# Altium PCB PCB.PcbDoc
Units mm, origin at the board's own origin, x right, y up, seen from the top; angles counter-clockwise.
Board outline 77.72 x 105.66 mm, 2 copper layers (Top Layer, Bottom Layer); 75 components, 50 nets, 276 pads, 0 vias.
Unrouted connection lines stored in the file: 198.
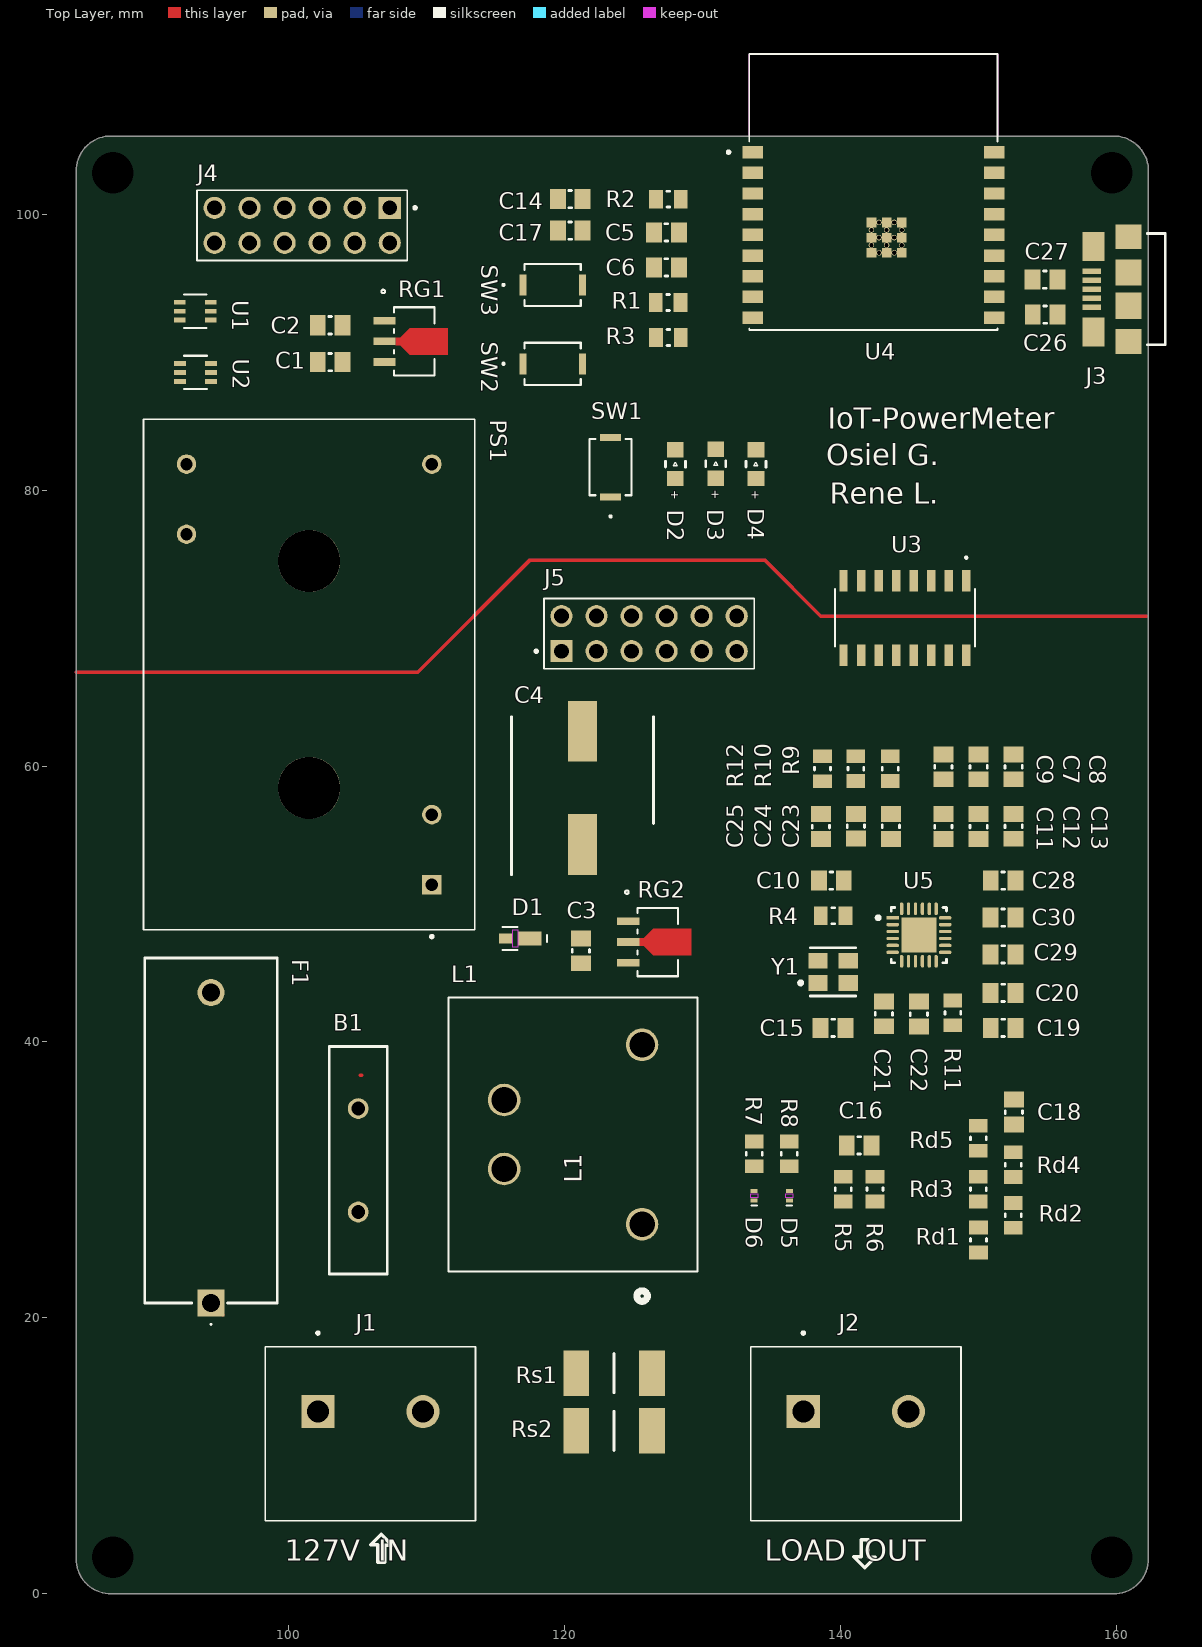
[diagram p0: Top Layer view]
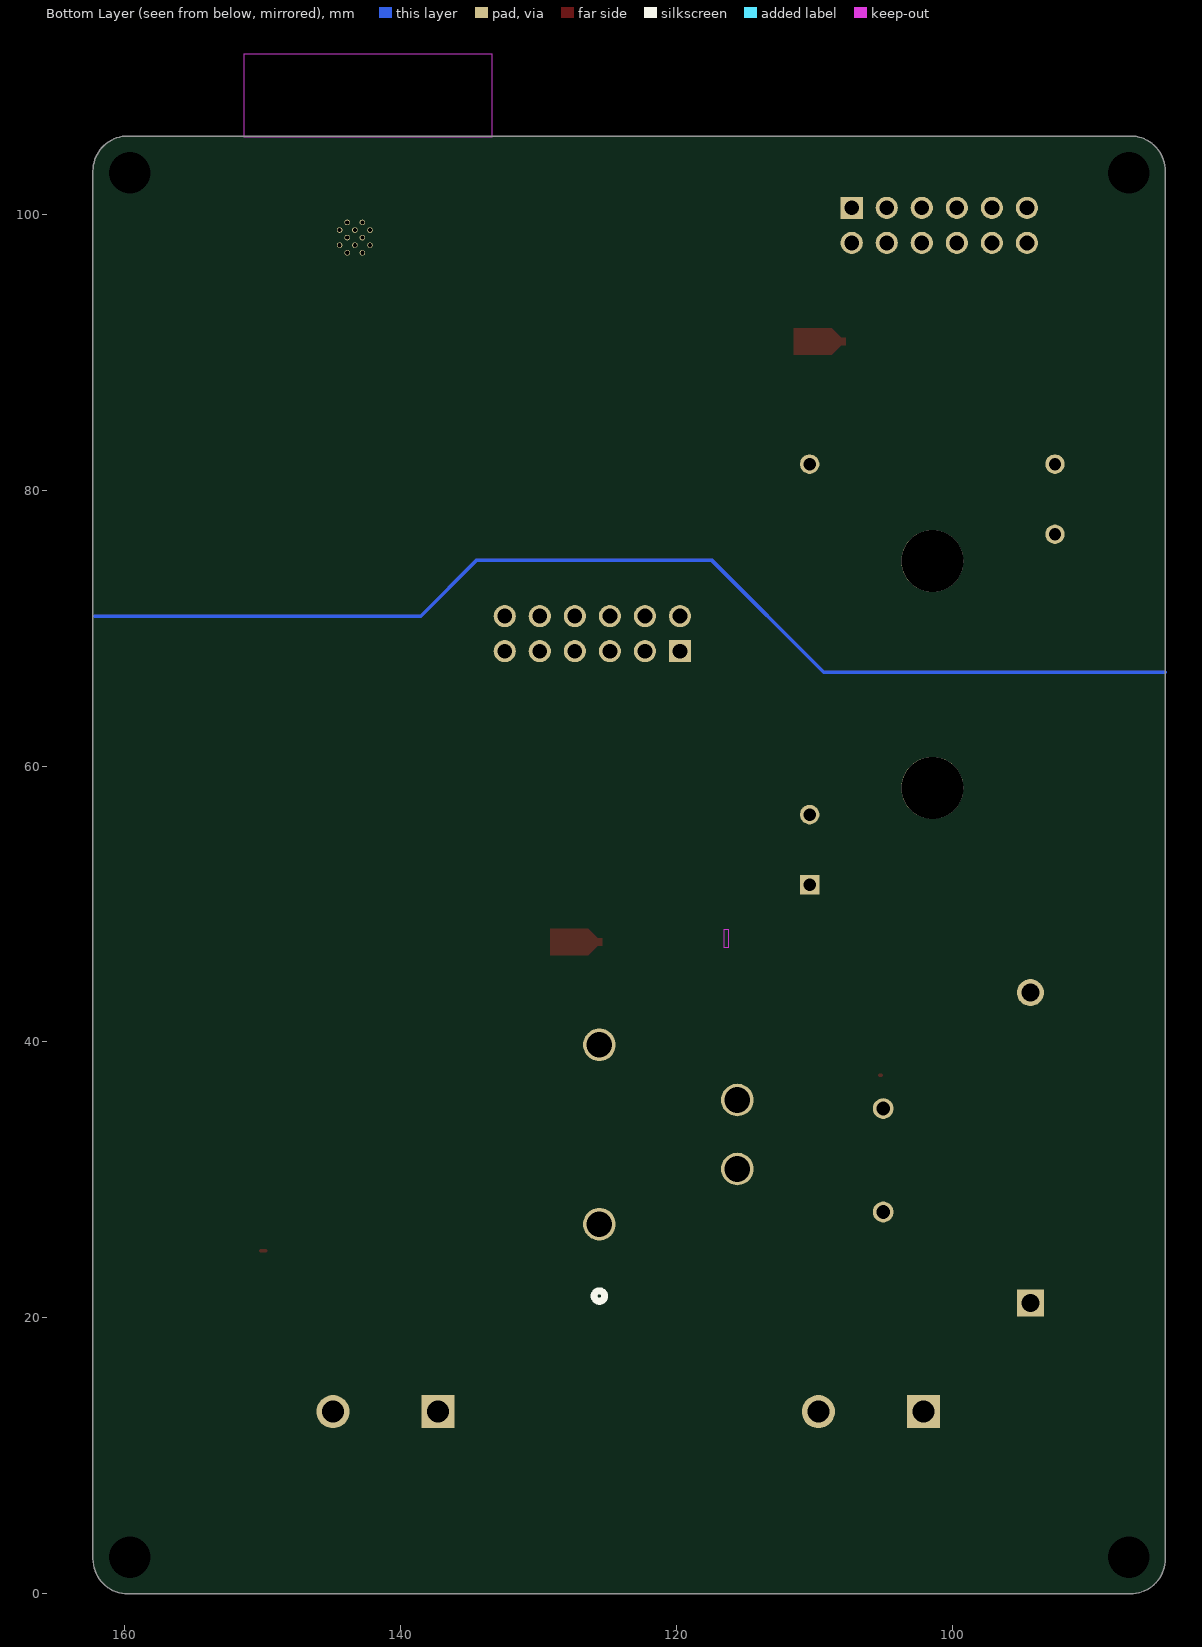
[diagram p1: Bottom Layer view, seen from below]

## Layer stack, top to bottom
Top Solder: solder mask 0.0102, Solder Resist, Dk 3.5
Top Layer: signal copper 0.0356
Dielectric 1: dielectric 0.32, FR-4, Dk 4.8
Bottom Layer: signal copper 0.0356
Bottom Solder: solder mask 0.0102, Solder Resist, Dk 3.5

## Board outline
84.582,2.54 ccw(c87.122,2.54) 87.122,0 159.766,0 ccw(c159.766,2.54) 162.306,2.54 162.306,103.124 ccw(c159.766,103.124) 159.766,105.664 159.776,105.664 87.122,105.664 ccw(c87.122,103.124) 84.582,103.124

## Design rules (kind name [scope] priority, off if disabled: settings)
Clearance [All] p1: gap=0.254 ignorepadtopadclearanceinfootprint=FALSE
DiffPairsRouting [All] p1: maxlimit=0.254 minlimit=0.254 mostfreqgap=0.254 toplayer_minwidth=0.381 toplayer_maxwidth=0.381 toplayer_prefwidth=0.381 bottomlayer_minwidth=0.381 bottomlayer_maxwidth=0.381 bottomlayer_prefwidth=0.381 maxuncoupledlength=12.7
PolygonConnect [All] p1: connectstyle=Relief reliefconductorwidth=0.254 reliefentries=4 polygonreliefangle="90 Angle" airgapwidth=0.254
RoutingVias [All] p1: holewidth=0.711 width=1.27 viastyle="Through Hole" minholewidth=0.711 minwidth=1.27 maxholewidth=0.711 maxwidth=1.27
SolderMaskExpansion [All] p1: expansion=0 istentingtop=FALSE
SupplyNets "Schematic Supply Nets_5" [InNet('N')] p1: voltage=0.000
SupplyNets "Schematic Supply Nets_4" [InNet('+3.3-ESP')] p2: voltage=0.000
SupplyNets "Schematic Supply Nets_3" [InNet('GND-2')] p3: voltage=0.000
SupplyNets "Schematic Supply Nets_1" [InNet('+3.3-STPM')] p4: voltage=0.000
Width [All] p1: maxlimit=0.254 minlimit=0.254 preferedwidth=0.254
29 further rules are at their usual default settings.

## Classes and differential pairs
differential pair USB: +USB_P -USB_N

## Components (designator, comment, footprint, x,y, rotation, side; value= is the part's Value field where it differs from the comment)
B1 "MOV-14D271K" MOV14D271K 105.029,27.679 r90 top
C1 "CAP-NP-2" CAP_0805_N 102.997,89.281 r0 top value=1µF
C2 "CAP-NP-2" CAP_0805_N 102.997,91.948 r0 top value=1µF
C3 "GRM21BR61E226ME44L" CAP_0805_N 121.158,46.609 r270 top value=22µF
C4 "AEF1013100M400R" CAPAE1030X1400N 121.285,58.42 r90 top value=10µF
C5 "CAP-NP-2" CAP_0805_N 127.37,98.679 r180 top value=10µF
C6 "CAP-NP-2" CAP_0805_N 127.37,96.139 r0 top value=100nF
C7 "CAP-NP-2" CAP_0805_N 149.987,59.944 r270 top value=150pF
C8 "CAP-NP-2" CAP_0805_N 152.531,59.945 r270 top value=1µF
C9 "CAP-NP-2" CAP_0805_N 147.447,59.944 r270 top value=100nF
C10 "CAP-NP-2" CAP_0805_N 139.319,51.689 r180 top value=15pF
C11 "CAP-NP-2" CAP_0805_N 147.447,55.615 r270 top value=4.7µF
C12 "CAP-NP-2" CAP_0805_N 149.987,55.615 r270 top value=150pF
C13 "CAP-NP-2" CAP_0805_N 152.531,55.627 r270 top value=100nF
C14 "CAP-NP-2" CAP_0805_N 120.396,101.092 r180 top value=100nF
C15 "15pF" CAP_0805_N 139.446,41.021 r0 top
C16 "C0805C103J3GECAUTO" CAP_0805_N 141.34,32.512 r180 top value=10nF
C17 "CAP-NP-2" CAP_0805_N 120.396,98.806 r0 top value=1µF
C18 "C0805C223J3GEC7210" CAP_0805_N 152.55,34.923 r270 top value=22nF
C19 "CAP-NP-2" CAP_0805_N 151.776,41.021 r180 top value=100nF
C20 "CAP-NP-2" CAP_0805_N 151.765,43.561 r180 top value=150pF
C21 "CAP-NP-2" CAP_0805_N 143.129,42.037 r90 top value=150pF
C22 "CAP-NP-2" CAP_0805_N 145.669,42.026 r90 top value=100nF
C23 "CAP-NP-2" CAP_0805_N 143.637,55.626 r90 top value=150pF
C24 "CAP-NP-2" CAP_0805_N 141.097,55.637 r90 top value=150pF
C25 "CAP-NP-2" CAP_0805_N 138.553,55.614 r90 top value=150pF
C26 "CAP-NP-2" CAP_0805_N 154.813,92.71 r0 top value=100nF
C27 "CAP-NP-2" CAP_0805_N 154.802,95.25 r180 top value=100nF
C28 "C0805C106K3PACTU" CAP_0805_N 151.776,51.689 r180 top value=10µF
C29 "C0805C151K3GACTU" CAP_0805_N 151.765,46.355 r180 top value=150pF
C30 "C0805C104K3RACTU" CAP_0805_N 151.765,49.022 r180 top value=100nF
D1 "RR1VWM4STR" PMDE_ROM 116.776,47.498 r180 top
D2 "BLUE" WL-SMCW_0805 128.016,81.881 r270 top
D3 "RED" WL-SMCW_0805 130.937,81.915 r270 top
D4 "GREEN" WL-SMCW_0805 133.858,81.881 r270 top
D5 "SML-P11DTT86R" LED_SML-P11D_ROM 136.271,28.861 r90 top
D6 "SML-P11YTT86R" LED_SML-P11D_ROM 133.731,28.861 r90 top
F1 "34.3129" 3132873 94.361,21.082 r90 top
J1 "TB005-762-02BE" CUI_TB005-762-02BE#1 102.108,13.208 r0 top
J2 "TB005-762-02BE" CUI_TB005-762-02BE#2 137.287,13.208 r0 top
J3 "10118192-0001LF" FCI-10118192-0001LF-5_V 160.858,94.568 r90 top
J4 "M20-9980646" HARWIN_M20-9980646 100.965,99.187 r180 top
J5 "M20-9980646" HARWIN_M20-9980646 126.111,69.596 r0 top
L1 "PMC9539.903NL" PMC9539_PUL 125.603,26.797 r90 top
PS1 "IRM-03-3.3" CONV_IRM-03-3.3 101.473,66.64 r90 top
R1 "RE0805FRE0710KL" RES_0805_N 127.497,93.599 r180 top value=10k
R2 "RE0805FRE0710KL" RES_0805_N 127.508,101.092 r0 top value=10k
R3 "RE0805FRE0710KL" RES_0805_N 127.508,91.059 r0 top value=10k
R4 "RE0805FRE071ML" RES_0805_N 139.446,49.149 r180 top value=1M
R5 "RT0805DRD071KL" RES_0805_N 140.185,29.341 r90 top value=1k
R6 "RT0805DRD071KL" RES_0805_N 142.483,29.337 r90 top value=1k
R7 "RE0805FRE071K5L" RES_0805_N 133.731,31.888 r270 top value=1.5k
R8 "RE0805FRE071K5L" RES_0805_N 136.271,31.888 r270 top value=1.5k
R9 "RE0805FRE0710KL" RES_0805_N 143.587,59.817 r90 top value=10k
R10 "RE0805FRE0710KL" RES_0805_N 141.097,59.817 r90 top value=10k
R11 "RE0805FRE0710KL" RES_0805_N 148.132,42.112 r270 top value=10k
R12 "RE0805FRE0710KL" RES_0805_N 138.68,59.805 r90 top value=10k
Rd1 "ERA-6AED2053V" RES_0805_N 149.987,25.654 r90 top value=205k
Rd2 "ERA-6AED2053V" RES_0805_N 152.5,27.435 r270 top value=205k
Rd3 "ERA-6AED2053V" RES_0805_N 149.975,29.341 r270 top value=205k
Rd4 "ERA-6AED2053V" RES_0805_N 152.5,31.116 r270 top value=205k
Rd5 "RT0805DRD071KL" RES_0805_N 149.975,33.024 r90 top value=1k
RG1 "AP7215-33YG-13" SOT-89-3_2P7X4P7_ONS-M 109.093,90.78 r270 top
RG2 "NCP785AH33T1G" SOT-89-3_2P7X4P7_ONS-M 126.746,47.244 r270 top
Rs1 "CSSU2512FT5L00" RESC6430X100N 123.571,16.002 r0 top value=5m
Rs2 "CSSU2512FT5L00" RESC6430X100N 123.571,11.811 r0 top value=5m
SW1 "CS1213AGF260" SW_CS1213AGF260_CRS 123.317,81.661 r90 top
SW2 "CS1213AGF260" SW_CS1213AGF260_CRS 119.126,89.154 r0 top
SW3 "CS1213AGF260" SW_CS1213AGF260_CRS 119.126,94.869 r0 top
U1 "LM66100QDCKRQ1" SC70-6_DCK_TEX 93.218,92.964 r0 top
U2 "LM66100QDCKRQ1" SC70-6_DCK_TEX 93.237,88.534 r0 top
U3 "SI8662AB-B-IS1R" SOIC-16_SIL 144.653,70.739 r270 top
U4 "ESP32-C3-WROOM-02-N4" MODULE_ESP32-C3-WROOM-02-H4 142.367,101.6 r0 top
U5 "STPM32TR" FP-QFN24L-7596209-IPC_B 145.669,47.752 r0 top
Y1 "ABM8W-16.0000MHZ-4-B1U-T3" FP-ABM8W-MFG 139.446,45.085 r0 top

## Footprints (in the part's own frame and the unit in brackets; to place one, negate y for a bottom-side part, rotate by r counter-clockwise, add the part's x,y. Pads: shape width x height; smd on the part's side, far side on the other; paste and mask are expansions set on the pad)
3132873 [mm]
  rect 1.95x1.95 hole 1.3: 1(0,0)
  round 1.95 hole 1.3: 2(22.5,0)
  silkscreen extent -1.6,-4.8 25,4.8, body extent -0.08,-4.83 22.82,4.77, height 11.48
CAP_0805_N [mm]
  rect 1.15x1.45 smd: 1(-0.9,0) 2(0.9,0)
  silkscreen extent -0.1,-0.63 0.1,0.63, body extent -1.1,-0.72 1.1,0.72, height 1.45
CAPAE1030X1400N [mm]
  rect 4.4x2.1 smd: 1(-4.1,0) 2(4.1,0)
  silkscreen extent -6.3,-5.15 5.15,5.15, body extent -5.75,-5.15 5.25,5.15, height 13.97
CONV_IRM-03-3.3 [mm]
  rect 1.408x1.408 / inner round 1.408 / far side rect 1.408x1.408 hole 0.9 mask+0.102: 1(-15.24,-8.89)
  round 1.408 hole 0.9 mask+0.102: 3(-10.16,-8.89) 13(15.24,-8.89) 14(15.24,8.89) 16(10.16,8.89)
  round 4.5 hole 4.5 unplated mask+0: ""(-8.22,0) ""(8.22,0)
  silkscreen extent -19.1,-12 18.5,12, body extent -18.5,-12 18.5,12, height 15
CUI_TB005-762-02BE#1 [mm]
  rect 2.4x2.4 hole 1.6: 1(0,0)
  round 2.4 hole 1.6: 2(7.62,0)
  silkscreen extent -3.81,-7.9 11.43,5.8, body extent -4.36,-8 11.48,4.6, height 21.7
CUI_TB005-762-02BE#2 [mm]
  rect 2.4x2.4 / inner round 2.4 / far side rect 2.4x2.4 hole 1.6: 1(0,0)
  round 2.4 hole 1.6: 2(7.62,0)
  silkscreen extent -3.81,-7.9 11.43,5.8, body extent -4.36,-8 11.48,4.6, height 21.7
FCI-10118192-0001LF-5_V [mm] "SMD, 5-Leads, Body 8.05x5.77mm, Pitch 0.65mm"
  rect 0.4x1.35 smd: 1(-1.3,2.675) 2(-0.65,2.675) 3(0,2.675) 4(0.65,2.675) 5(1.3,2.675)
  rect 2.1x1.6 smd: 6(-3.1,2.55) 7(3.1,2.55)
  rect 1.8x1.9 smd: 8(-3.8,0) 9(3.8,0)
  rect 1.9x1.9 smd: 10(-1.2,0) 11(1.2,0)
  silkscreen extent -4.03,-2.67 4.03,-1.35, body extent -4.03,-2.67 4.03,3.1, height 2.7
FP-ABM8W-MFG [mm]
  rect 1.4x1.15 smd paste+0 mask+0: 1(-1.1,-0.8) 2(1.1,-0.8) 3(1.1,0.8) 4(-1.1,0.8)
  silkscreen extent -2.47,-1.75 1.65,1.75, body extent -1.9,-1.48 1.9,1.48, height 0.25
FP-QFN24L-7596209-IPC_B [mm]
  rect 0.91x0.239 smd paste+0 mask+0: 1(-1.901,1.25)
  rrect100% 0.91x0.239 smd paste+0 mask+0: 2(-1.901,0.75) 3(-1.901,0.25) 4(-1.901,-0.25) 5(-1.901,-0.75) 6(-1.901,-1.25) 13(1.901,-1.25) 14(1.901,-0.75) 15(1.901,-0.25) 16(1.901,0.25) 17(1.901,0.75) 18(1.901,1.25)
  rrect100% 0.239x0.91 smd paste+0 mask+0: 7(-1.25,-1.901) 8(-0.75,-1.901) 9(-0.25,-1.901) 10(0.25,-1.901) 11(0.75,-1.901) 12(1.25,-1.901) 19(1.25,1.901) 20(0.75,1.901) 21(0.25,1.901) 22(-0.25,1.901) 23(-0.75,1.901) 24(-1.25,1.901)
  rect 2.55x2.55 smd paste-1000 mask+0: 25(0,0)
  silkscreen extent -3.08,-2 2,2, body extent -2.61,-2.61 2.61,2.61, height 0.25
HARWIN_M20-9980646 [mm]
  rect 1.605x1.605 / inner round 1.605 / far side rect 1.605x1.605 hole 1.07: 1(-6.35,-1.27)
  round 1.605 hole 1.07: 2(-6.35,1.27) 3(-3.81,-1.27) 4(-3.81,1.27) 5(-1.27,-1.27) 6(-1.27,1.27) 7(1.27,-1.27) 8(1.27,1.27) 9(3.81,-1.27) 10(3.81,1.27) 11(6.35,-1.27) 12(6.35,1.27)
  silkscreen extent -8.28,-2.54 7.62,2.54, body extent -7.62,-2.54 7.62,2.54, height 8.34
LED_SML-P11D_ROM [mil]
  rect 11.5x20 smd paste+0 mask+0: 1(-13.75,0) 2(13.75,0)
  Top Layer keep-out region: -6,-10 -6,10 6,10 6,-10
  silkscreen extent -28,-8 -28,7, body extent -20,-12 20,12, height 10
MODULE_ESP32-C3-WROOM-02-H4 [mm]
  rect 1.5x0.9 smd: 1(-8.75,2.9) 2(-8.75,1.4) 3(-8.75,-0.1) 4(-8.75,-1.6) 5(-8.75,-3.1) 6(-8.75,-4.6) 7(-8.75,-6.1) 8(-8.75,-7.6) 9(-8.75,-9.1) 10(8.75,-9.1) 11(8.75,-7.6) 12(8.75,-6.1) 13(8.75,-4.6) 14(8.75,-3.1) 15(8.75,-1.6) 16(8.75,-0.1) 17(8.75,1.4) 18(8.75,2.9)
  rect 0.7x0.7 smd: 19(-0.14,-2.2) 20(0.96,-2.2) 21(2.06,-2.2) 22(-0.14,-3.3) 23(0.96,-3.3) 24(2.06,-3.3) 25(-0.14,-4.4) 26(0.96,-4.4) 27(2.06,-4.4)
  round 0.4 hole 0.3 mask+0: 28(0.41,-2.2) 29(1.51,-2.2) 30(-0.14,-2.75) 31(0.96,-2.75) 32(2.06,-2.75) 33(0.41,-3.3) 34(1.51,-3.3) 35(-0.14,-3.85) 36(0.96,-3.85) 37(2.06,-3.85) 38(0.41,-4.4) 39(1.51,-4.4)
  Keep-Out Layer region: 9,4 -9,4 -9,10 9,10
  Keep-Out Layer region: 9,4 -9,4 -9,10 9,10
  silkscreen extent -10.6,-10 9,10, body extent -9,-10 9,10, height 3.35
MOV14D271K [mm]
  round 1.5 hole 1: 1(0,0) 2(7.5,0)
  silkscreen extent -4.5,-2.1 12,2.1, body extent -4.82,-4.22 12.26,4.3, height 21.48
PMC9539_PUL [mil]
  round 93 hole 73 paste-99999 mask+0: 1(0,0) 2(157.48,393.7) 3(354.33,393.7) 4(511.81,0)
  silkscreen extent -220,-159 647,552, body extent -109,-129 619,525, height 574
PMDE_ROM [mil]
  rect 67x39 smd paste+0 mask+0: 1(-27.5,0)
  rect 38x28 smd paste+0 mask+0: 2(42,0)
  Top Layer keep-out region: 8,-25.5 8,25.5 21,25.5 21,-25.5
  Keep-Out Layer region: 8,-25.5 8,25.5 21,25.5 21,-25.5
  silkscreen extent -76,-32 51,33, body extent -53,-27 53,27, height 39
RES_0805_N [mm] "Chip Resistor, 2-Leads, Body 2.00x1.25mm, IPC Medium Density"
  rect 1x1.35 smd: 1(-0.9,0) 2(0.9,0)
  silkscreen extent -0.1,-0.58 0.1,0.58, body extent -1.05,-0.67 1.05,0.67, height 0.6
RESC6430X100N [mm]
  rect 1.85x3.3 smd: 1(-2.75,0) 2(2.75,0)
  silkscreen extent 0,-1.43 0,1.43, body extent -3.21,-1.52 3.14,1.53, height 1
SC70-6_DCK_TEX [mil]
  rect 33.5x14 smd paste+0 mask+0: 1(-44.25,25.59) 2(-44.25,0) 3(-44.25,-25.59) 4(44.25,-25.59) 5(44.25,0) 6(44.25,25.59)
  silkscreen extent -32,-48 32,48, body extent -47,-43 47,43, height 43
SOIC-16_SIL [mm]
  rect 1.55x0.6 smd paste+0 mask+0: 1(-2.7,4.445) 2(-2.7,3.175) 3(-2.7,1.905) 4(-2.7,0.635) 5(-2.7,-0.635) 6(-2.7,-1.905) 7(-2.7,-3.175) 8(-2.7,-4.445) 9(2.7,-4.445) 10(2.7,-3.175) 11(2.7,-1.905) 12(2.7,-0.635) 13(2.7,0.635) 14(2.7,1.905) 15(2.7,3.175) 16(2.7,4.445)
  silkscreen extent -4.44,-5.08 2.08,5.08, body extent -3.13,-4.95 3.13,4.95, height 1.75
SOT-89-3_2P7X4P7_ONS-M [mil]
  rect 22x63 smd paste+0 mask+0: 1(-59.06,-84.5) 2(0,-84.5) 3(59.06,-84.5)
  Top Layer region: 11,-53 -11,-53 -11,-40 -38,-13 -38,95 38,95 38,-13 11,-40
  silkscreen extent -147,-93 98,58, body extent -93,-104 93,73, height 69
SW_CS1213AGF260_CRS [mil]
  rect 20x60 smd paste+0 mask+0: 1(-85,0) 2(85,0)
  silkscreen extent -143,-60 80,60, body extent -95,-55 95,55, height 80
WL-SMCW_0805 [mm]
  rect 1.1x1.2 smd: 1(-1.05,0) 2(1.05,0)
  silkscreen extent -0.21,-0.72 0.22,0.72, body extent -1,-0.63 1,0.63, height 0.7

## Part data
B1: library part CMP-00030-00002-4, "Var MOV 175VAC/225VDC 4500A 270V Thru-Hole Radial Bulk", Case/Package=Radial, Max Operating Temperature=105°C, Min Operating Temperature=-40°C, Mounting Technology="Radial, Through Hole"
C1 C2 C8 C17: library part CMP-001-00100-1, "Multilayer Ceramic Capacitors MLCC – SMD/SMT; KEMET; C0805C105K3RACTU; 1 µF; 0805; 25 V; 25 V", Case/Package=0805, Max Operating Temperature=125°C, Min Operating Temperature=-55°C, Tolerance=10%, Voltage Rating=25V, Mounting Technology="Surface Mount", Pins=2
C3: library part CMP-001-00092-3, "25V 22uF X5R ±20% 0805 Multilayer Ceramic Capacitors MLCC - SMD/SMT ROHS", Case/Package=0805, Max Operating Temperature=85°C, Min Operating Temperature=-55°C, Tolerance=20%, Voltage Rating=25V, Mounting Technology="Surface Mount"
C4: library part CMP-001-00086-1, "Aluminum Electrolytic Capacitor, Polarized, Aluminum (wet), 400V, 20% +Tol, 20% -Tol, 10uF, Surface Mount, 4141", Max Operating Temperature=105°C, Min Operating Temperature=-40°C, Ripple Current=97mA, Mounting Technology="Surface Mount"
C5 C28: library part CMP-001-00098-1, "0805 C 10UF Ceramic Multilayer Capacitor, 25 VDC, +85DEGC, X5R Dielec, +/-10%", Case/Package=0805, Max Operating Temperature=85°C, Min Operating Temperature=-55°C, Tolerance=10%, Voltage Rating=25V, Mounting Technology="Surface Mount"
C6 C9 C13 C14 C19 C22 C26 C27 C30: library part CMP-001-00097-1, "25V 100nF X7R ±10% 0805 Multilayer Ceramic Capacitors MLCC - SMD/SMT ROHS", Case/Package=0805, Max Operating Temperature=125°C, Min Operating Temperature=-55°C, Tolerance=10%, Voltage Rating=25V, Mounting Technology="Surface Mount", Pins=2
C7 C12 C20 C21 C23 C24 C25 C29: library part CMP-001-00096-1, "SMD Comm C0G 0805 (2012Metric) Ceramic Capacitor 0.079Lx0.049W 2.00mmx1.25mm C0G NP0 ±10% 150pF", Case/Package=0805, Max Operating Temperature=125°C, Min Operating Temperature=-55°C, Tolerance=10%, Voltage Rating=25V, Mounting Technology="Surface Mount"
C10 C15: library part CMP-001-00095-2, "Ceramic Capacitor, Multilayer, Ceramic, 25V, 5% +Tol, 5% -Tol, C0G, 30ppm/Cel TC, 0.000015uF, Surface Mount, 0805", Case/Package=0805, Max Operating Temperature=125°C, Min Operating Temperature=-55°C, Tolerance=5%, Voltage Rating=25V, Mounting Technology="Surface Mount"
C11: library part CMP-001-00101-1, "Ceramic Capacitor, Multilayer, Ceramic, 25V, 10% +Tol, 10% -Tol, X7R, 15% TC, 4.7uF, Surface Mount, 0805", Case/Package=0805, Max Operating Temperature=125°C, Min Operating Temperature=-55°C, Mounting Technology="Surface Mount"
C16: library part CMP-001-00093-2, "Ceramic Capacitor, Multilayer, Ceramic, 25V, 5% +Tol, 5% -Tol, C0G, 30ppm/Cel TC, 0.01uF, Surface Mount, 0805", Max Operating Temperature=125°C, Min Operating Temperature=-55°C, Mounting Technology="Surface Mount"
C18: library part CMP-001-00094-1, "Ceramic Capacitor, Multilayer, Ceramic, 25V, 5% +Tol, 5% -Tol, C0G, 30ppm/Cel TC, 0.022uF, Surface Mount, 0805", Max Operating Temperature=125°C, Min Operating Temperature=-55°C, Mounting Technology="Surface Mount"
D1: library part CMP-004-00034-3, "Rectifier Diode, 1 Phase, 1 Element, 1A, 400V V(RRM), Silicon", Max Operating Temperature=175°C, Mounting Technology="Surface Mount"
D2: library part CMP-007-00045-1, "Led, Blue, 470 Nm, 3.2 V, 30 Ma, 145 Mcd Rohs Compliant: Yes", Case/Package=0805, Forward Current=100mA, Forward Voltage=3.2V, Max Operating Temperature=85°C, Min Operating Temperature=-40°C, Mounting Technology="Surface Mount"
D3: library part CMP-007-00039-1, "LED Uni-Color Red 630nm 2-Pin Chip 0805(2012Metric) T/R", Case/Package=0805, Forward Current=100mA, Forward Voltage=2V, Max Operating Temperature=85°C, Min Operating Temperature=-40°C, Mounting Technology="Surface Mount"
D4: library part CMP-004-00033-3, "0805, Green Typ.(@20mA): 520nm, 450mcd, 3.2V, 140Â° InGaN", Case/Package=0805, Forward Current=100mA, Forward Voltage=2V, Max Operating Temperature=85°C, Min Operating Temperature=-40°C, Check_prices=https://www.snapeda.com/parts/150080GS75000/Wurth+Electronics/view-part/?ref=eda, Component Type=Standard, Design Item ID=WL-SMCW_0805, MF="Wurth Electronics", Mounting Technology="Surface Mount", MP=150080GS75000, Pins=2, SnapEDA_Link=https://www.snapeda.com/parts/150080GS75000/Wurth+Electronics/view-part/?ref=snap, Source=WL-SMCW_0805.SchLib
D5: library part CMP-007-00036-4, "LED orange LED0402 wavelength 605nm light intensity 7.3mcd Front Mounting", Case/Package=0402, Forward Current=20mA, Forward Voltage=2.1V, Max Operating Temperature=85°C, Min Operating Temperature=-40°C, Mounting Technology="Surface Mount", Pins=2
D6: library part CMP-007-00037-4, "LED Uni-Color Yellow Chip LED 2-Pin 0402 T/R", Case/Package=0402, Forward Current=20mA, Forward Voltage=2.1V, Max Operating Temperature=85°C, Min Operating Temperature=-40°C, Mounting Technology="Surface Mount", Pins=2
F1: library part CMP-005-00013-1, "Fuse 5 x 20 mm, 16 A, T, 250 V (AC), 160 A breaking capacity, 0034.3129"
J1 J2: library part CMP-002-00074-2, "2~24 Poles, Screw Type, Horizontal, 7.62 Pitch, 26~10 (AWG), Terminal Block Connector", Case/Package=None, Check_prices=https://www.snapeda.com/parts/TB005-762-02BE/Same+Sky/view-part/?ref=eda, Component Type=Standard, Design Item ID=TB005-762-02BE, MF="Same Sky", MP=TB005-762-02BE, Pins=2, SnapEDA_Link=https://www.snapeda.com/parts/TB005-762-02BE/Same+Sky/view-part/?ref=snap, Source=TB005-762-02BE.SchLib
J3: library part CMP-002-00071-1, "Usb Connector, 5 Contact(S), Female, Right Angle, Surface Mount Terminal, Locking, Receptacle", Max Operating Temperature=80°C, Min Operating Temperature=-30°C, Voltage Rating=100V, Connector Type="Receptacle, USB", Gender=Receptacle, Mounting Technology="Horizontal, Surface Mount", Pins=5
J4 J5: library part CMP-002-00075-1, "Board Connector, 12 Contact(s), 1 Row(s), Male, Straight, Solder Terminal", Max Current Rating=3A, Max Operating Temperature=105°C, Min Operating Temperature=-40°C, Connector Type="Male Pin", Gender=Male, Mounting Technology="Through Hole", Pins=12
L1: library part CMP-012-00001-6, "250惟@2.1MHz 1.3m惟 2 Plugin, 19.6x17.8mm Common Mode Filters ROHS", Current Rating=25A, Max Operating Temperature=125°C, Min Operating Temperature=-40°C
PS1: library part CMP-020-000000-1, "DC-DC Converter, PCB Mnt, 3W, 3.3V@600mA, IRM-03 Series", Package=None, Check_prices=https://www.snapeda.com/parts/IRM-03-3.3/Mean+Well/view-part/?ref=eda, Component Type=Standard, Design Item ID=IRM-03-3.3, MF="MEAN WELL USA Inc.", MP=IRM-03-3.3, Pin Count=5, SnapEDA_Link=https://www.snapeda.com/parts/IRM-03-3.3/Mean+Well/view-part/?ref=snap, Source=IRM-03-3.3.SchLib
R1 R2 R3 R9 R10 R11 R12: library part CMP-009-00182-2, "Res Thick Film 0805 10K Ohm 1% 1/8W ±50ppm/°C Molded SMD Paper T/R", Case/Package=0805, Max Operating Temperature=155°C, Min Operating Temperature=-55°C, Tolerance=1%, Mounting Technology="Surface Mount"
R4: library part CMP-009-00185-2, "Res, 1M, 1%, 0.125W, 0805, Thick Film Rohs Compliant: Yes", Case/Package=0805, Max Operating Temperature=155°C, Min Operating Temperature=-55°C, Tolerance=1%, Mounting Technology="Surface Mount"
R5 R6 Rd5: library part CMP-009-00181-3, "125mW Thin Film Resistor 150V ±0.5% ±25ppm/℃ 1kΩ 0805 Chip Resistor - Surface Mount ROHS", Case/Package=0805, Max Operating Temperature=155°C, Min Operating Temperature=-55°C, Tolerance=0.5%, Voltage Rating=150V, Mounting Technology="Surface Mount"
R7 R8: library part CMP-009-00184-2, "Chip Resistor Precision Grade Thick Film 0805 1.5kOhm 1% Paper T/R", Case/Package=0805, Max Operating Temperature=155°C, Min Operating Temperature=-55°C, Tolerance=1%, Mounting Technology="Surface Mount"
Rd1 Rd2 Rd3 Rd4: library part CMP-009-00180-5, "Res Thin Film 0805 205K Ohm 0.5% 0.125W(1/8W) ±25ppm/C Pad SMD Automotive T/R", Case/Package=0805, Max Operating Temperature=155°C, Min Operating Temperature=-55°C, Tolerance=0.5%, Voltage Rating=100V, Mounting Technology="Surface Mount"
RG1: library part CMP-019-00051-11, "Voltage Regulators, LDO, SOT89-3L 3.3V/0.6A 250MV 3.3-5.5V 1.2V", Case/Package=SOT-89-3, Dropout Voltage=250mV, Max Operating Temperature=85°C, Max Power Dissipation=790mW, Max Supply Voltage=5.5V, Min Operating Temperature=-40°C, Min Supply Voltage=3.3V, Output Current=600mA, Mounting Technology="Surface Mount", Output Voltage=3.3V, Pins=3
RG2: library part CMP-019-00049-8, "NCP785A Series 3.3 V 10 mA High Performance Linear Regulator - SOT-89", Case/Package=SOT-89-3, Max Operating Temperature=85°C, Max Supply Voltage=450V, Min Operating Temperature=-40°C, Output Current=10mA, Output Voltage=3.3V, Mounting Technology="Surface Mount", Pins=3
Rs1 Rs2: library part CMP-009-00178-3, "Fixed Resistor, 5W, 0.005ohm, 0.158V, 1% +/-Tol, 50ppm/Cel, Surface Mount, 2512", Max Operating Temperature=170°C, Min Operating Temperature=-55°C, Tolerance=1%, Mounting Technology="Surface Mount"
SW1 SW2 SW3: library part CMP-011-00014-2, "Description", Manufacturer_Name="CIT Relay & Switch", Copyright="Copyright (C) 2025 Ultra Librarian. All rights reserved.", Design Item ID=CS1213AGF260, Manufacturer_Part_Number=CS1213AGF260, Source=CS1213AGF260.SchLib, Type="Tactile Switches"
U1 U2: library part CMP-031-00008-6, "Automotive 1.5-V to 5.5-V, 1.5-A, 0.5-µA IQ ideal diode with integrated FET 6-SC70 -40 to 125", Pins=6
U3: library part CMP-00026-00001-3, "General Purpose tal Isolator 2500Vrms 6 Channel 1Mbps 35kV/µs CMTI 16-SOIC (0.154 , 3.90mm Width)", Case/Package=SOIC, Max Operating Temperature=125°C, Min Operating Temperature=-40°C
U4: library part CMP-031-00009-1, "WiFi Modules (802.11) (Engineering Samples) SMD module, ESP32-C3, 4MB SPI flash, PCB antenna, -40 C +85 C", Case/Package=Package, Availability="In Stock", Check_prices=https://www.snapeda.com/parts/ESP32-C3-WROOM-02-N4/Espressif+Systems/view-part/?ref=eda, Component Type=Standard, Design Item ID=ESP32-C3-WROOM-02-N4, MF="Espressif Systems", MP=ESP32-C3-WROOM-02-N4, Pins=39, Price=None, Purchase-URL=https://pricing.snapeda.com/search/part/ESP32-C3-WROOM-02-N4/?ref=eda, SnapEDA_Link=https://www.snapeda.com/parts/ESP32-C3-WROOM-02-N4/Espressif+Systems/view-part/?ref=snap, Source=ESP32-C3-WROOM-02-N4.SchLib
U5: library part CMP-031-00006-2, "STPM32 Series 3.3 V 4.3 mA 3.6 kHz Single Phase Metering IC - QFN-24", Case/Package=QFN, Max Operating Temperature=85°C, Max Supply Voltage=3.65V, Min Operating Temperature=-40°C, Min Supply Voltage=2.95V, Mounting Technology="Surface Mount", Pins=24
Y1: library part CMP-003-00030-1, "Crystal 16MHz ±10ppm (Tol) ±10ppm (Stability) 4pF FUND 70Ohm 4-Pin SMD T/R", Frequency=16MHz, Load Capacitance=4pF, Max Operating Temperature=70°C, Min Operating Temperature=-20°C, ESR=40, Mounting Technology="Surface Mount"

## Free pads (board coordinates)
  oval 2x0 hole 3 unplated: 2(87.249,2.667) 2(87.249,102.997) 2(159.639,2.667) 2(159.639,102.997)

## Nets (pads, with @x,y where several pads share a name; then routed paths per layer and width w, separated by ;. In a path a pad name is that pad's centre, name@x,y a point inside that pad or via, vN(x,y) a via of type N, cw(c..) or ccw(c..) an arc to the next point about the centre after c; other vN are vias at no path point)
+3.3-AC: PS1.16 U1.1 U2.3
+3.3-ESP: C5.1 C6.2 J4.8 R1.1 R2.1 R3.1 U1.6 U2.6 U3.1 U4.1
+3.3-STPM: C3.2 C28.2 C29.2 C30.2 J5.6 R9.2 R10.2 R11.2 R12.2 RG2.3 U3.16 U5.17
+3.3-USB: C1.2 RG1.3 U1.3 U2.1
+5V-USB: C2.2 J3.1 RG1.2
clkout: J5.11 U5.1
en1: C21.2 C22.2 J5.4 R11.1 U5.7
en2: C14.1 C17.2 J4.11 R2.2 SW2.2 U4.2
esp_int: J4.5 U3.6 U4.15
esp_rx: J4.1 U3.5 U4.3
esp_scs: J4.9 U3.3 U4.17
esp_syn: J4.7 U3.2 U4.18
esp_tx: J4.3 U3.4 U4.4
GND-2: C1.1 C2.1 C5.2 C6.1 C14.2 C17.1 C26.1 C27.1 D2.1 D3.1 D4.1 J3.5 J3.6 J3.7 J3.8 J3.9 J3.10 J3.11 PS1.14 RG1.1 SW1.1 SW2.1 SW3.1 U1.2 U1.5 U2.2 U2.5 U3.8 U4.9 U4.19 U4.20 U4.21 U4.22 U4.23 U4.24 U4.25 U4.26 U4.27 U4.28 U4.29 U4.30 U4.31 U4.32 U4.33 U4.34 U4.35 U4.36 U4.37 U4.38 U4.39
iin1: J2.1 R5.1 Rs1.2 Rs2.2
iip1: B1.1 J1.2 L1.1 R6.1 Rs1.1 Rs2.1
input_L: F1.1 J1.1 J2.2 Rd1.1 | length 1.5
  Top Layer w0.254: F1.1 F1.1@95.209,20.234 ; Rd1.1@149.8,24.874 Rd1.1@150.15,24.874
L: D1.2 L1.3 PS1.1
led1: J5.10 R7.1 U5.4
led2: J5.12 R8.1 U5.5
led_bt: D2.2 U4.5
led_err: D3.2 J4.10 U4.6
led_ok: D4.2 J4.12 U4.10
N: C3.1 C4.2 C7.1 C8.1 C9.1 C10.1 C11.1 C12.1 C13.1 C15.1 C18.1 C19.1 C20.1 C21.1 C22.1 C23.1 C24.1 C25.1 C28.1 C29.1 C30.1 D5.1 D6.1 L1.2 PS1.3 Rd5.2 RG2.2 U3.9 U5.9 U5.13 U5.14 U5.16 U5.18 U5.25 Y1.2 Y1.4
NetB1_2: B1.2 F1.2 L1.4 | length 0.2
  Top Layer w0.254: F1.2 F1.2@94.481,43.582 ; 105.163,37.592 105.283,37.592
NetC4_1: C4.1 D1.1 RG2.1
NetC10_2: C10.2 R4.2 U5.2 Y1.1
NetC16_1: C16.1 R6.2 U5.10
NetC16_2: C16.2 R5.2 U5.11
NetD5_2: D5.2 R8.2
NetD6_2: D6.2 R7.2
NetRd1_2: Rd1.2 Rd2.2
NetRd2_1: Rd2.1 Rd3.2
NetRd3_1: Rd3.1 Rd4.2
ResetB: J4.4 R1.2 SW3.2 U4.7
sp1: J4.2 R3.2 U4.16
sp3: J4.6 SW1.2 U4.8
stpm_int: J5.2 U3.11 U5.6
stpm_rx: J5.9 U3.13 U5.23
stpm_scl: C23.2 J5.3 R9.1 U5.22
stpm_scs: C24.2 J5.1 R10.1 U3.14 U5.21
stpm_syn: C25.2 J5.5 R12.1 U3.15 U5.20
stpm_tx: J5.7 U3.12 U5.24
USB_N: C26.2 J3.2 U4.13
USB_P: C27.2 J3.3 U4.14
vdda: C7.2 C8.2 C9.2 U5.15
vddd: C11.2 C12.2 C13.2 U5.19
vip1: C18.2 Rd4.1 Rd5.1 U5.8
vref1: C19.2 C20.2 J5.8 U5.12
xtal1: C15.2 R4.1 U5.3 Y1.3
pads on no net: J3.4 PS1. PS1.13 U1.4 U2.4 U3.7 U3.10 U4.11 U4.12

## Other copper
Multi-Layer:
  lines w0.254: 84.582,66.802 109.347,66.802 117.475,74.93 134.493,74.93 138.557,70.866 162.179,70.866

## Silkscreen, mask and mechanical layers (free items; w line width, h text height)
Top Overlay:
  lines w0.254: 105.927,3.564 106.689,4.326 107.477,3.538 106.934,3.538 106.934,2.304 106.925,2.294 106.435,2.294 106.435,3.564 105.927,3.564 ; 140.944,2.693 141.732,1.905 142.494,2.667 141.986,2.667 141.986,3.937 141.496,3.937 141.487,3.928 141.487,2.693 140.944,2.693
  text "IoT-PowerMeter" at 139.065,84.455 h1.52
  text "Osiel G." at 138.938,81.788 h1.52
  text "Rene L." at 139.192,78.994 h1.52
  text "127V  IN" at 99.695,2.413 h1.52
  text "LOAD  OUT" at 134.493,2.413 h1.52
Mechanical 1:
  the board outline again, w0.1

## Text inside footprints (layer, text, board x,y; h text height)
D1: Mechanical 13 "*" at 117.996,48.133 h1.27 r180
D2: Top Overlay "+" at 127.716,79.981 h0.61 r270; Mechanical 13 "+" at 127.716,79.981 h0.61 r270
D3: Top Overlay "+" at 130.637,80.015 h0.61 r270; Mechanical 13 "+" at 130.637,80.015 h0.61 r270
D4: Top Overlay "+" at 133.558,79.981 h0.61 r270; Mechanical 13 "+" at 133.558,79.981 h0.61 r270
J3: Mechanical 1 "PCB Edge" at 161.62,81.36 h1 r90
U1: Mechanical 13 "*" at 92.583,92.697 h1.27
U2: Mechanical 13 "*" at 92.602,88.267 h1.27